# Altium PCB Lab5_TB_PCB1.PcbDoc
Units mil, origin at the board's own origin, x right, y up, seen from the top; angles counter-clockwise.
Board outline 1425 x 1380 mil, 2 copper layers (Top Layer, Bottom Layer); 22 components, 25 nets, 79 pads, 4 vias.
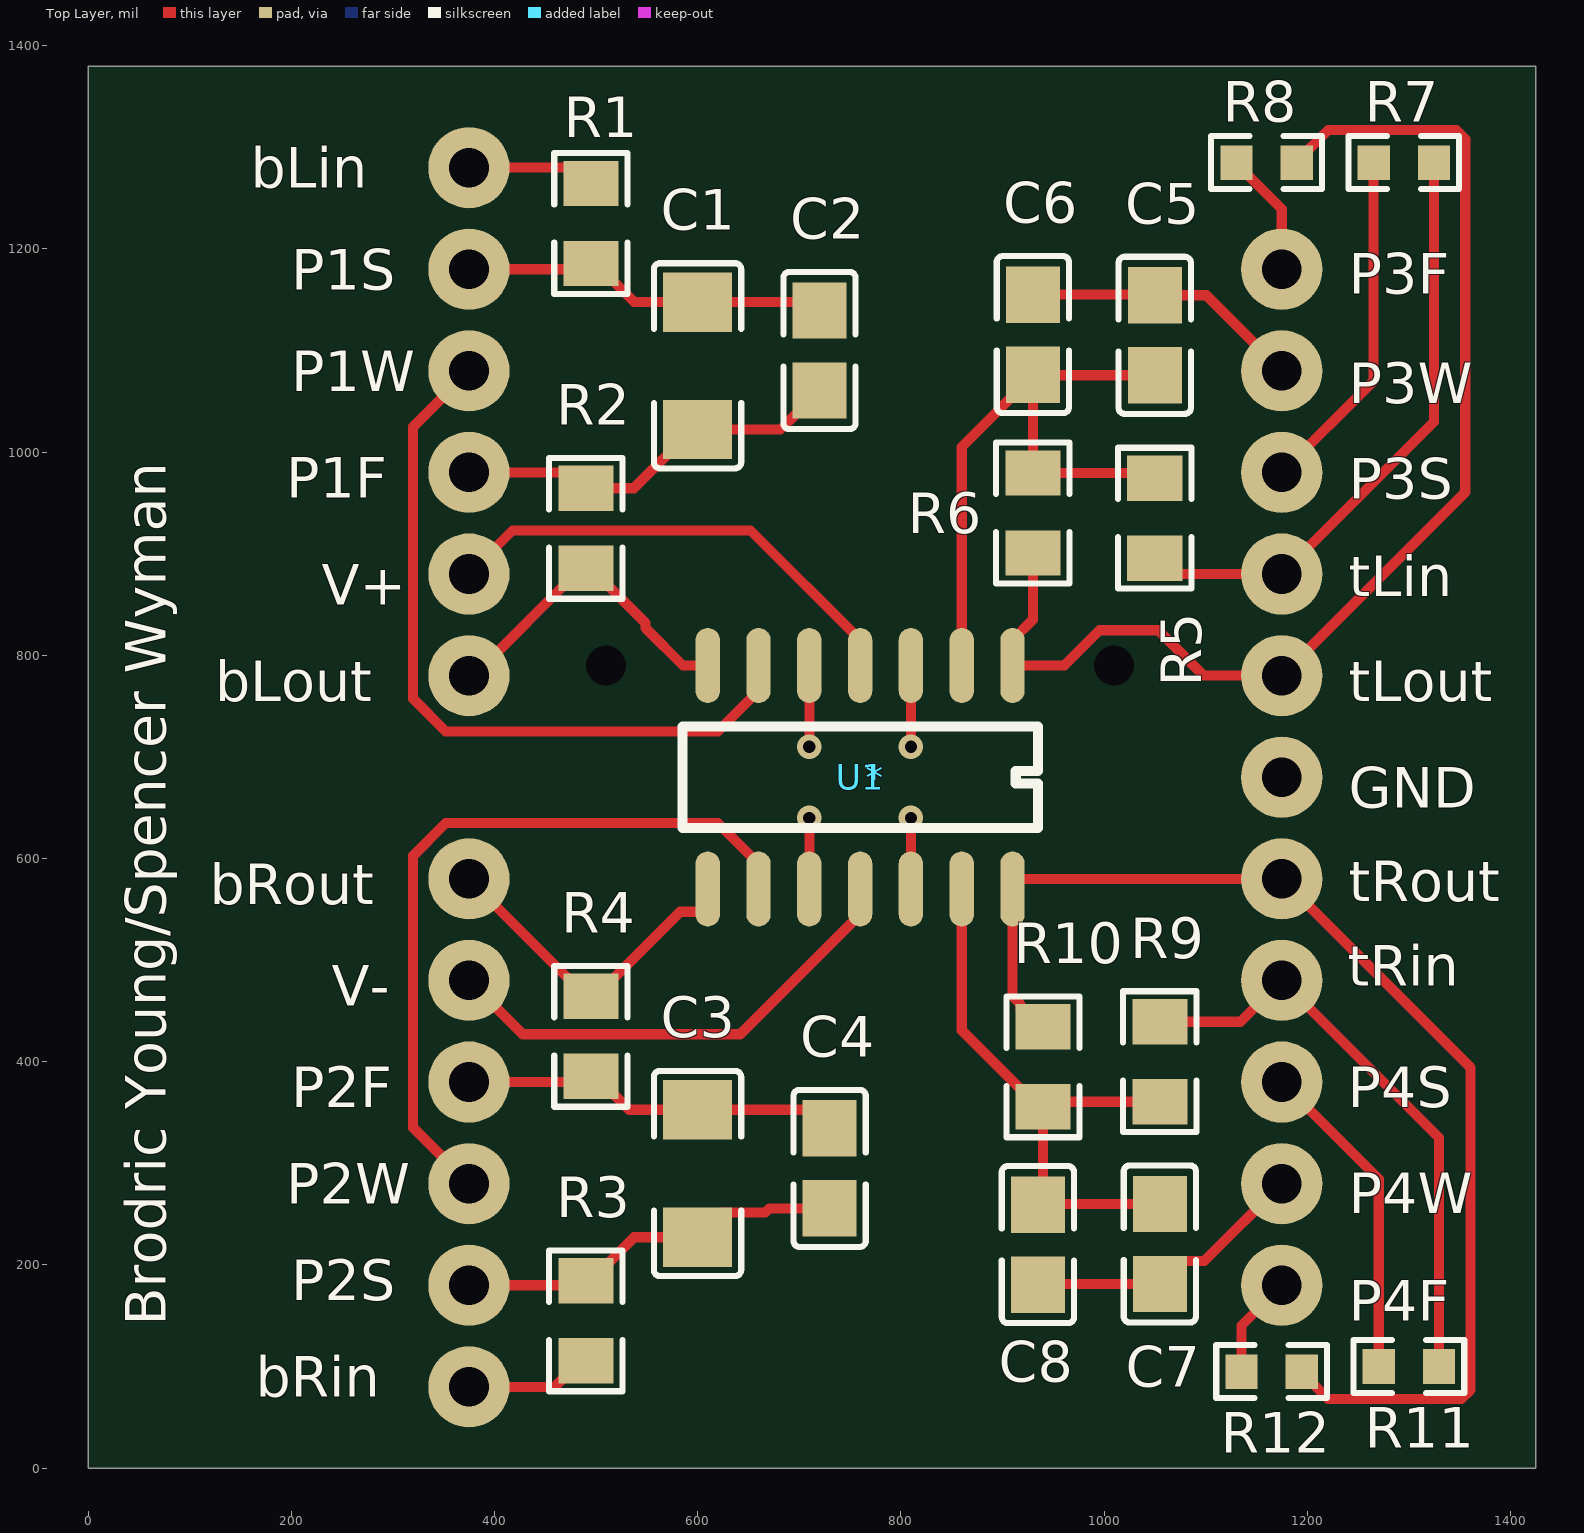
[diagram p0: Top Layer view]
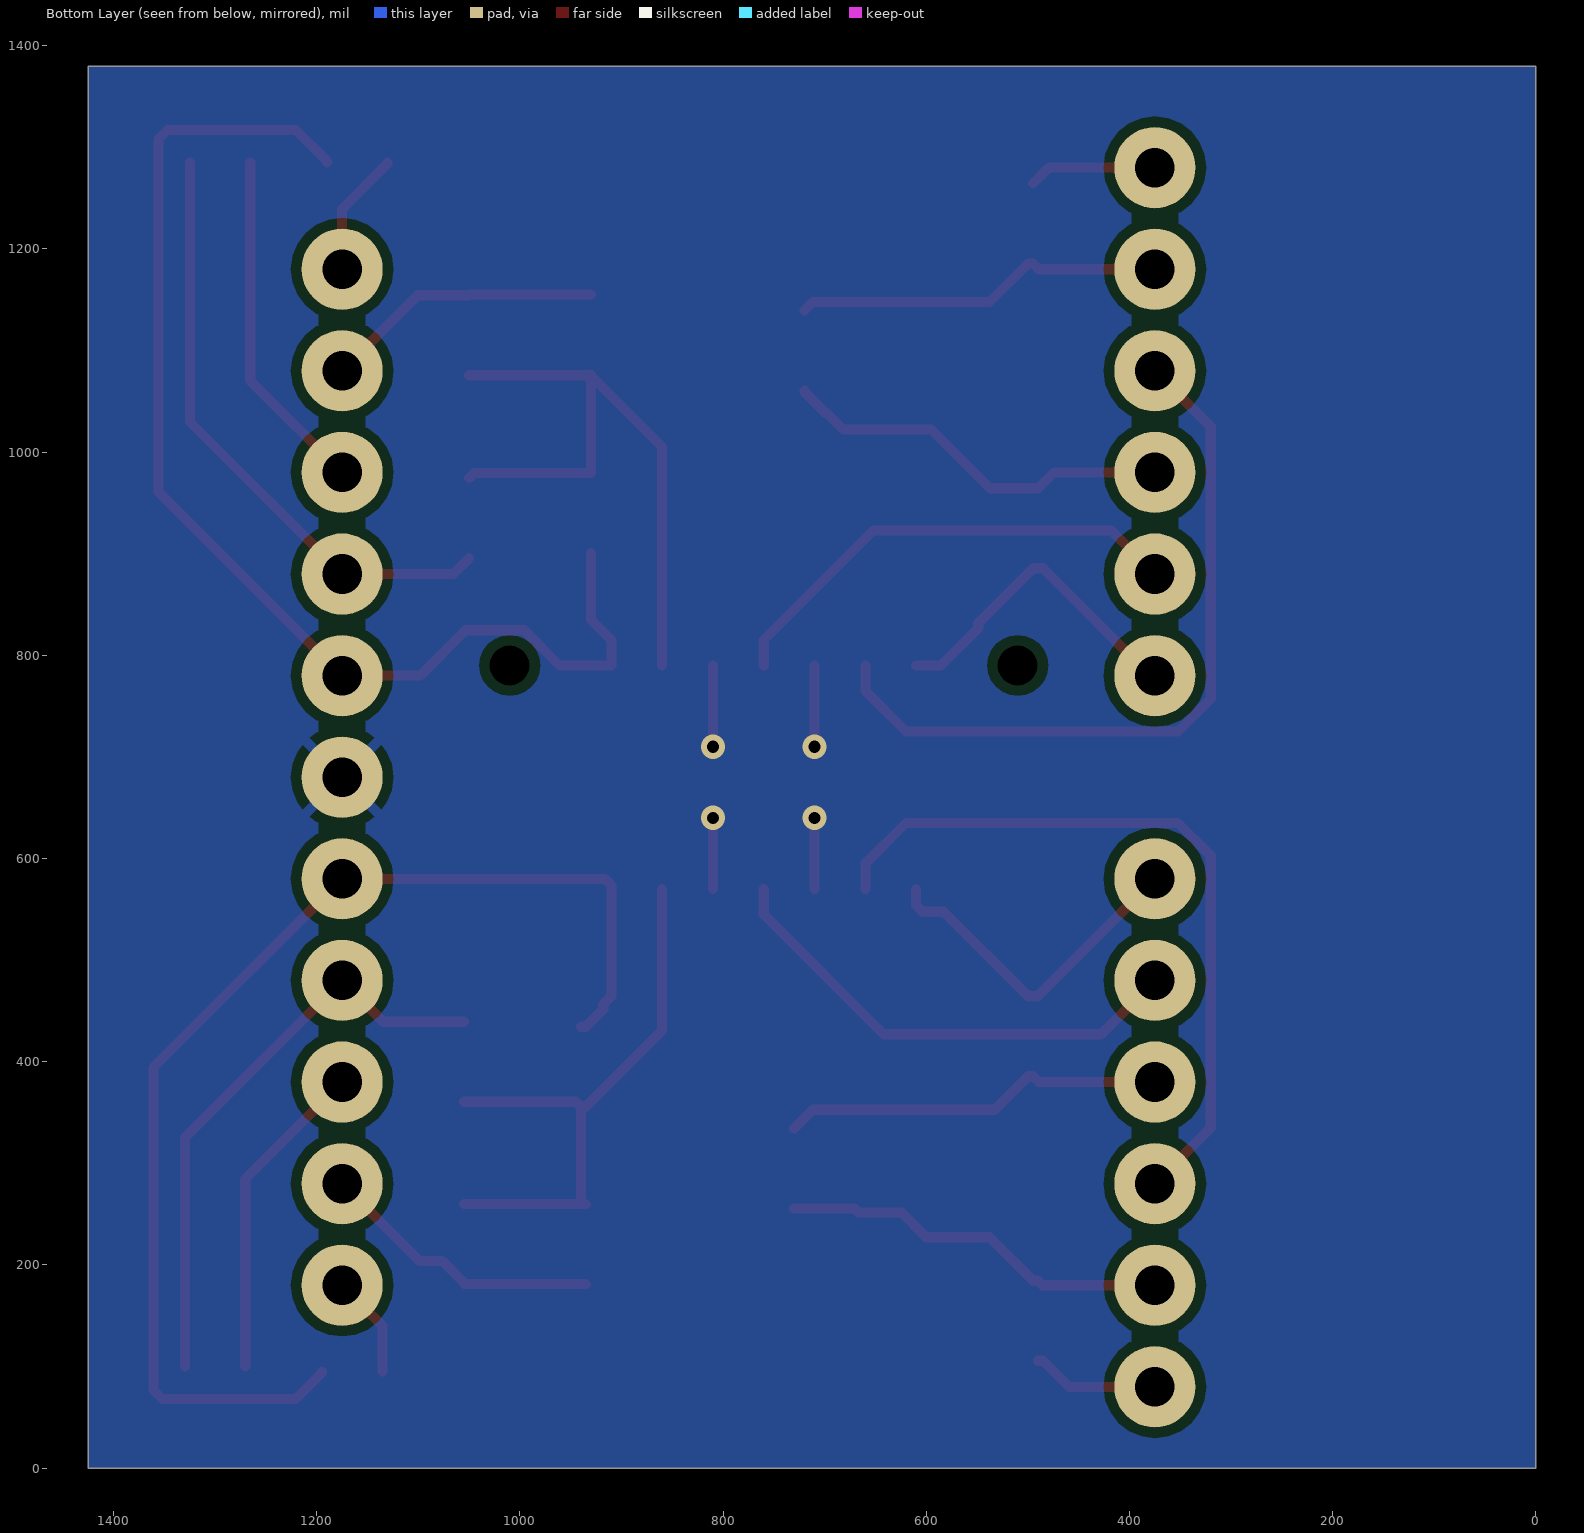
[diagram p1: Bottom Layer view, seen from below]

## Layer stack, top to bottom
Top Solder: solder mask 0.4, Solder Resist, Dk 3.5
Top Layer: signal copper 1.4
Dielectric 1: dielectric 12.6, FR-4, Dk 4.8
Bottom Layer: signal copper 1.4
Bottom Solder: solder mask 0.4, Solder Resist, Dk 3.5

## Board outline
0,0 0,1380 1425,1380 1425,0

## Design rules (kind name [scope] priority, off if disabled: settings)
AssemblyTestPointUsage [All] p1: isadvanced=TRUE
AssemblyTestpoint [All] p1: isadvanced=TRUE testpointundercomponent=TRUE minsize=40 maxsize=100 preferedsize=60 minholesize=0 maxholesize=40 preferedholesize=32 testpointgrid=1 usegrid=TRUE gridtolerance=0.01 allowsidetop=TRUE allowsidebottom=TRUE
Clearance Clearance_1 [OnMid vs OnMid] p1: gap=10 ignorepadtopadclearanceinfootprint=FALSE sourcerule=41 cellrowname=All cellrowtype=0 cellcolname=All cellcoltype=0 innerlayers=TRUE
Clearance Clearance_2 [(ExistsOnLayer('Top Layer') Or ExistsOnLayer('Bottom Layer')) vs (ExistsOnLayer('Top Layer') Or ExistsOnLayer('Bottom Layer'))] p2: gap=10 ignorepadtopadclearanceinfootprint=FALSE sourcerule=41 cellrowname=All cellrowtype=0 cellcolname=All cellcoltype=0 outerlayers=TRUE
Clearance [All] p3: gap=10 ignorepadtopadclearanceinfootprint=FALSE ismatrix=TRUE
ComponentClearance [All] p1: isadvanced=TRUE gap=10 collisioncheckmode=3 verticalgap=10 showdistances=FALSE
FabricationTestPointUsage [All] p1: isadvanced=TRUE valid=0 allowmultiple=FALSE
FabricationTestpoint [All] p1: isadvanced=TRUE side=3 testpointundercomponent=TRUE minsize=40 maxsize=100 preferedsize=60 minholesize=0 maxholesize=40 preferedholesize=32 testpointgrid=1 allowsidetop=TRUE allowsidebottom=TRUE usegrid=TRUE gridtolerance=0.01
FanoutControl Fanout_BGA [IsBGA] p1: isadvanced=TRUE bgadir=Out bgaviamode=Centered fanoutstyle=Auto fanoutdirection=Alternating viagrid=1 // Fanout_BGA (Default Rule)
FanoutControl Fanout_LCC [IsLCC] p2: isadvanced=TRUE bgadir=Out bgaviamode=Centered fanoutstyle=Auto fanoutdirection=Alternating viagrid=1 // Fanout_LCC (Default Rule)
FanoutControl Fanout_SOIC [IsSOIC] p3: isadvanced=TRUE bgadir=Out bgaviamode=Centered fanoutstyle=Auto fanoutdirection=Alternating viagrid=1 // Fanout_SOIC (Default Rule)
FanoutControl Fanout_Small [(CompPinCount < 5)] p4: isadvanced=TRUE bgadir=Out bgaviamode=Centered fanoutstyle=Auto fanoutdirection=OutThenIn viagrid=1 // Fanout_Small (Default Rule)
FanoutControl Fanout_Default [All] p5: isadvanced=TRUE bgadir=Out bgaviamode=Centered fanoutstyle=Auto fanoutdirection=Alternating viagrid=1 // Fanout_Default (Default Rule)
Height [All] p1: isadvanced=TRUE minheight=0 maxheight=1000 prefheight=500
HoleSize [All] p1: isadvanced=TRUE absolutevalues=TRUE maxlimit=100 minlimit=1 maxpercent=80.000 minpercent=20.000
HoleToHoleClearance [All] p1: isadvanced=TRUE gap=10 allowstackedmicrovias=TRUE
LayerPairs [All] p1: isadvanced=TRUE enforce=TRUE
MinimumSolderMaskSliver [All] p1: isadvanced=TRUE minsoldermaskwidth=10
NetAntennae [All] p1: isadvanced=TRUE netantennaetolerance=0
PasteMaskExpansion [All] p1: isadvanced=TRUE expansion=0
PlaneClearance [All] p1: isadvanced=TRUE clearance=20
PlaneConnect [All] p1: isadvanced=TRUE planeconnectstyle=Relief reliefexpansion=20 reliefentries=4 reliefconductorwidth=10 reliefairgap=10
PolygonConnect [All] p1: thpad.connectstyle=Relief thpad.reliefconductorwidth=10 thpad.reliefentries=4 thpad.polygonreliefangle="45 Angle" thpad.airgapwidth=10 smdpad.connectstyle=Relief smdpad.reliefconductorwidth=10 smdpad.reliefentries=4 smdpad.polygonreliefangle="90 Angle" smdpad.airgapwidth=10 via.connectstyle=Direct via.reliefconductorwidth=10 via.reliefentries=4 via.polygonreliefangle="90 Angle" via.airgapwidth=10
RoutingCorners [All] p1: isadvanced=TRUE cornerstyle=45-Degree minsetback=100 maxsetback=100
RoutingPriority [All] p1: isadvanced=TRUE routingpriority=0
RoutingVias [All] p1: holewidth=12 width=24 viastyle="Through Hole" minholewidth=12 minwidth=24 maxholewidth=12 maxwidth=24
ShortCircuit [All] p1: isadvanced=TRUE allowed=FALSE
SilkToSilkClearance [All] p1: isadvanced=TRUE silktosilkclearance=10
SilkToSolderMaskClearance [IsPad] p1: isadvanced=TRUE minsilkscreentomaskgap=10 clearancetoexposedcopper=TRUE
SolderMaskExpansion [All] p1: isadvanced=TRUE expansion=4 istentingtop=FALSE
SupplyNets "Schematic Supply Nets_4" [InNet('Vpos')] p1: isadvanced=TRUE voltage=0.000
SupplyNets "Schematic Supply Nets_3" [InNet('tLin')] p2: isadvanced=TRUE voltage=0.000
SupplyNets "Schematic Supply Nets_2" [InNet('bLin')] p3: isadvanced=TRUE voltage=0.000
SupplyNets "Schematic Supply Nets_1" [InNet('GND')] p4: isadvanced=TRUE voltage=0.000
SupplyNets "Schematic Supply Nets" [InNet('Vneg')] p5: isadvanced=TRUE voltage=0.000
UnRoutedNet [All] p1: isadvanced=TRUE
UnpouredPolygon [All] p1: isadvanced=TRUE
Width [All] p1: maxlimit=10 minlimit=10 preferedwidth=10
4 further rules are at their usual default settings.

## Components (designator, comment, footprint, x,y, rotation, side; value= is the part's Value field where it differs from the comment)
* "23 Pin Header" KBS_23pin_Header_TB_EQ 1174.93,680 r0 top locked
C1 "GRM31M5C1H473JA01L" C1206 599.93,1085 r270 top value=47nF
C2 "0805B332K500NT" C0805 719.93,1100 r90 top value=3.3nF
C3 "GRM31M5C1H473JA01L" C1206 599.93,290 r90 top value=47nF
C4 "0805B332K500NT" C0805 729.93,295 r270 top value=3.3nF
C5 "0805B333K500NT" C0805 1049.93,1115 r90 top value=33nF
C6 "0805B332K500NT" C0805 929.93,1115.63 r90 top value=3.3nF
C7 "0805B333K500NT" C0805 1054.93,220.63 r270 top value=33nF
C8 "0805B332K500NT" C0805 934.93,220 r270 top value=3.3nF
R1 "ARG05FTC4001N" R0805 494.94,1225 r270 top value=4kΩ
R2 "ARG05FTC4001N" R0805 489.94,925 r270 top value=4kΩ
R3 "ARG05FTC4001N" R0805 489.94,145 r90 top value=4kΩ
R4 "ARG05FTC4001N" R0805 494.94,425 r90 top value=4kΩ
R5 "ARG05FTC4001N" R0805 1049.93,935 r90 top value=4kΩ
R6 "ARG05FTC4001N" R0805 929.93,940 r270 top value=4kΩ
R7 "0603WAF8200T5E" R0603 1295,1285 r180 top value=820Ω
R8 "0603WAF8200T5E" R0603 1160,1285 r0 top value=820Ω
R9 "ARG05FTC4001N" R0805 1054.93,400 r270 top value=4kΩ
R10 "ARG05FTC4001N" R0805 939.93,395 r90 top value=4kΩ
R11 "0603WAF8200T5E" R0603 1300,100 r180 top value=820Ω
R12 "0603WAF8200T5E" R0603 1165,95 r0 top value=820Ω
U1 "LM324DT" KBS_SO14_w_Guide_Pin_Holes 759.93,680 r180 top

## Footprints (in the part's own frame and the unit in brackets; to place one, negate y for a bottom-side part, rotate by r counter-clockwise, add the part's x,y. Pads: shape width x height; smd on the part's side, far side on the other; paste and mask are expansions set on the pad)
C0805 [mm]
  rect 1.41x1.35 smd paste-100 mask+0.051: 1(-1,0) 2(1,0)
  silkscreen extent -1.96,-0.9 1.96,0.9
C1206 [mm]
  rect 1.485x1.728 smd paste-100 mask+0.051: 1(-1.593,0) 2(1.593,0)
  silkscreen extent -2.56,-1.09 2.56,1.09
KBS_23pin_Header_TB_EQ [mil]
  round 80 hole 39 mask+2: 1(-800,600) 2(0,500) 3(-800,500) 4(0,400) 5(-800,400) 6(0,300) 7(-800,300) 8(0,200) 9(-800,200) 10(0,100) 11(-800,100) 12(0,0) 13(-800,-100) 14(0,-100) 15(-800,-200) 16(0,-200) 17(-800,-300) 18(0,-300) 19(-800,-400) 20(0,-400) 21(-800,-500) 22(0,-500) 23(-800,-600)
  body extent -840,-645 40,640, height 1
KBS_SO14_w_Guide_Pin_Holes [mil]
  oval 24x74 smd paste+0 mask+2: 1(-150,-110) 2(-100,-110) 3(-50,-110) 4(0,-110) 5(50,-110) 6(100,-110) 7(150,-110) 8(150,110) 9(100,110) 10(50,110) 11(0,110) 12(-50,110) 13(-100,110) 14(-150,110)
  round 0 hole 39.37 unplated mask+0: MH_1(250,-110) MH_2(-250,-110)
  silkscreen extent -175,-50 175,50, body extent -187,-147 187,147, height 1
R0603 [mil]
  rect 31.75x34.02 smd paste-3937.01 mask+2: 1(-29.66,0) 2(29.66,0)
  silkscreen extent -55,-26 55,26
R0805 [mm]
  rect 1.133x1.377 smd paste-100 mask+0.051: 1(-1,0) 2(1,0)
  silkscreen extent -1.76,-0.92 1.76,0.92

## Part data
C1 C3: "Capacitance: Tolerance:±5% Tolerance:±5% Voltage Rated: Temperature Coefficient:", JLCPCB Part Class="Extended Part", LCSC Part Name="47nF ±5% 50V", Manufacturer=muRata(村田), Tolerance=±5%, Add into BOM=yes, Convert to PCB=yes, Datasheet=https://atta.szlcsc.com/upload/public/pdf/source/20180228/C21812_15198055830211377594.pdf, Device=GRM31M5C1H473JA01L, Manufacturer Part=GRM31M5C1H473JA01L, Supplier=LCSC, Supplier Footprint=1206, Supplier Part=C21812, Symbol=GRM31M5C1H473JA01L
C2 C4 C6 C8: "Capacitance:3.3nF Tolerance:±10% Tolerance:±10% Voltage Rated: Temperature Coefficient:", JLCPCB Part Class="Extended Part", LCSC Part Name="3.3nF ±10% 50V", Manufacturer=FH(风华), Tolerance=±10%, Add into BOM=yes, Convert to PCB=yes, Datasheet=https://atta.szlcsc.com/upload/public/pdf/source/20200305/C486355_26A10D38EF8C2A5C37091D0039909270.pdf, Device=0805B332K500NT, Manufacturer Part=0805B332K500NT, Supplier=LCSC, Supplier Footprint=0805, Supplier Part=C1738, Symbol=0805B332K500NT
C5 C7: "Capacitance:33nF Tolerance:±10% Tolerance:±10% Voltage Rated: Temperature Coefficient:", JLCPCB Part Class="Basic Part", LCSC Part Name="33nF ±10% 50V", Manufacturer=FH(风华), Tolerance=±10%, Add into BOM=yes, Convert to PCB=yes, Datasheet=https://atta.szlcsc.com/upload/public/pdf/source/20200305/C486355_26A10D38EF8C2A5C37091D0039909270.pdf, Device=0805B333K500NT, Manufacturer Part=0805B333K500NT, Supplier=LCSC, Supplier Footprint=0805, Supplier Part=C1739, Symbol=0805B333K500NT
R1 R2 R3 R4 R5 R6 R9 R10: "Type:Thin Film Resistor Resistance: Tolerance:±1% Tolerance:±1% Power(Watts): Overload Voltage (Max): Temperature Coefficient:±25ppm/℃ Temperature Coefficient:±25ppm/℃ Operating Temperature Range:-55℃~+155℃ Operating Temperature Range:-55℃~+155℃", LCSC Part Name="薄膜电阻 4kΩ ±1% 125mW", Manufacturer=Viking(光颉), Operating Temperature Range=-55℃~+155℃, Temperature Coefficient=±25ppm/℃, Tolerance=±1%, Add into BOM=yes, Convert to PCB=yes, Datasheet=https://atta.szlcsc.com/upload/public/pdf/source/20211009/C2828883_CAE7D170B8B230FC4A048BDC7B3A81FC.pdf, Device=ARG05FTC4001N, Manufacturer Part=ARG05FTC4001N, Supplier=LCSC, Supplier Footprint=0805, Supplier Part=C2828855, Symbol=ARG05FTC4001N, Type="Thin Film Resistor"
R7 R8 R11 R12: "Type:Thick Film Resistors Resistance: Tolerance:±1% Tolerance:±1% Power(Watts): Overload Voltage (Max): Temperature Coefficient:±100ppm/℃ Temperature Coefficient:±100ppm/℃ Operating Temperature Range:-55℃~+155℃ Operating Temperature Range:-55℃~+155℃", LCSC Part Name="820Ω ±1% 100mW 厚膜电阻", Manufacturer=UNI-ROYAL(厚声), Operating Temperature Range=-55℃~+155℃, Temperature Coefficient=±100ppm/℃, Tolerance=±1%, Add into BOM=yes, Convert to PCB=yes, Datasheet=https://atta.szlcsc.com/upload/public/pdf/source/20200306/C422600_1E6D84923E4A46A82E41ADD87F860B5C.pdf, Device=0603WAF8200T5E, Manufacturer Part=0603WAF8200T5E, Supplier=LCSC, Supplier Footprint=0603, Supplier Part=C23253, Symbol=0603WAF8200T5E, Type="Thick Film Resistors"
U1: "Number of Circuits:Quad Gain Bandwidth Product(GBP):1.3MHz Current - Input Bias(Ib):20nA Slew Rate(SR):0.4V/us Output Current:40mA -3db Bandwidth:- Supply Current:1.5mA Operating Temperature:0℃~+70℃ Operating Temperature:0℃~+70℃", Current - Input Bias(Ib)=20nA, JLCPCB Part Class="Basic Part", Manufacturer=ST(意法半导体), Operating Temperature=0℃~+70℃, Output Current=40mA, Supply Current=1.5mA, -3db Bandwidth=-, Add into BOM=yes, Convert to PCB=yes, Datasheet=https://atta.szlcsc.com/upload/public/pdf/source/20160408/1460100649718.pdf, Device=LM324DT, Gain Bandwidth Product(GBP)=1.3MHz, LCSC Part Name=LM324DT, Manufacturer Part=LM324DT, Number of Circuits=Quad, Relevance=|, Slew Rate(SR)=0.4V/us, Supplier=LCSC, Supplier Footprint=SOIC-14, Supplier Part=C71035, Symbol=LM324DT

## Via types
v1: diameter 24, hole 12, Top Layer to Bottom Layer, tented both sides, 4 vias

## Nets (pads, with @x,y where several pads share a name; then routed paths per layer and width w, separated by ;. In a path a pad name is that pad's centre, name@x,y a point inside that pad or via, vN(x,y) a via of type N, cw(c..) or ccw(c..) an arc to the next point about the centre after c; other vN are vias at no path point)
bLin: *.1 R1.1 | length 126.5
  Top Layer w10: *.1 479.31,1280 R1.1
bLout: *.11 R2.2 U1.7 | length 321.2
  Top Layer w10: *.11 379.49,780 485.12,885.63 R2.2 494.75,885.63 548.8,831.57 548.8,826.76 585.57,790 U1.7
bRin: *.23 R3.1 | length 125.6
  Top Layer w10: *.23 459.49,80 485.12,105.63 R3.1
bRout: *.13 R4.2 U1.8 | length 336.3
  Top Layer w10: *.13 374.94,579.56 490.12,464.37 R4.2 499.75,464.37 582.93,547.56 603.47,547.56 609.93,554.02 U1.8
GND: *.12 U1.3 U1.5 U1.10 U1.12 | length 300
  Top Layer w10: U1.10 v1(709.93,640) ; v1(709.93,710) U1.5 ; U1.12 v1(809.93,640) ; v1(809.93,710) U1.3
NetC5_1: C5.1 C6.1 R5.2 R6.1 U1.2 | length 652.4
  Top Layer w10: U1.2 859.93,1005.08 C6.1@929.93,1075.08 ; C6.1 C6.1@929.93,1075.08 ; C6.1@930.57,1075.63 C5.1 ; R5.2 1044.93,979.37 R6.1 C6.1@929.93,1075.08
NetC7_1: C7.1 C8.1 R9.2 R10.1 U1.13 | length 578.9
  Top Layer w10: U1.13 859.93,430.82 935.12,355.63 R10.1 ; C8.1 935.57,260 C7.1 ; C8.1@939.93,264.37 R10.1 ; R9.2 944.93,360.63 R10.1
P1F: *.7 C1.2 C2.1 R2.1 | length 392
  Top Layer w10: *.7 474.31,980 R2.1 537.22,964.37 595.15,1022.3 C1.2 681.61,1022.3 697.18,1037.87 698.36,1037.87 719.93,1059.45 C2.1
P1S: *.3 C1.1 C2.2 R1.2 | length 366.5
  Top Layer w10: *.3 489.31,1180 R1.2 499.75,1185.63 537.68,1147.7 C1.1 711.61,1147.7 C2.2
P1W: *.5 U1.6 | length 740.5
  Top Layer w10: *.5 319.94,1025 319.94,757.22 352.15,725 619.93,725 659.93,765 U1.6
P2F: *.17 C3.2 C4.1 R4.1 | length 378.6
  Top Layer w10: *.17 489.31,380 R4.1 499.75,385.63 532.68,352.7 C3.2 711.61,352.7 C4.1
P2S: *.21 C3.1 C4.2 R3.2 | length 386.3
  Top Layer w10: *.21 485.56,180 R3.2 494.75,184.37 537.68,227.3 C3.1 624.17,251.53 666.61,251.53 670.7,255.63 C4.2
P2W: *.19 U1.9 | length 740.5
  Top Layer w10: *.19 319.94,335 319.94,602.78 352.15,635 619.93,635 659.93,595 U1.9
P3F: *.2 R8.1 | length 123.5
  Top Layer w10: R8.1 1130.34,1283.87 1174.93,1239.27 *.2
P3S: *.6 R7.2 | length 342.4
  Top Layer w10: *.6 1265.34,1070.4 R7.2
P3W: *.4 C5.2 C6.2 | length 276.1
  Top Layer w10: C6.2 1049.31,1155 C5.2 1100.57,1154.37 *.4
P4F: *.22 R12.1 | length 101.4
  Top Layer w10: R12.1 1135.34,140.41 *.22
P4S: *.18 R11.2 | length 319.5
  Top Layer w10: *.18 1270.34,284.6 R11.2
P4W: *.20 C7.2 C8.2 | length 281.9
  Top Layer w10: C8.2 935.57,181.26 C7.2 1054.93,182.44 1076.51,204.02 1098.95,204.02 *.20
tLin: *.8 R5.1 R7.1 | length 598.5
  Top Layer w10: R5.1 1065.57,880 *.8 1324.66,1029.72 R7.1
tLout: *.10 R6.2 R8.2 U1.1 | length 1203.3
  Top Layer w10: R6.2 929.93,835 909.93,815 U1.1 960.88,790 995.57,824.69 1053.44,824.69 1098.12,780 *.10 1355.54,960.6 1355.54,1308.22 1346.75,1317.01 1220.54,1317.01 1189.66,1286.13 R8.2
tRin: *.16 R9.1 R11.1 | length 580.9
  Top Layer w10: R9.1 1134.31,439.37 *.16 1329.66,325.27 R11.1
tRout: *.14 R10.2 R12.2 U1.14 | length 1183.6
  Top Layer w10: R10.2 935.12,434.37 917.83,451.66 917.83,456.48 909.93,464.37 U1.14 909.93,573.53 916.4,580 *.14 1360.54,394.4 1360.54,76.78 1351.75,67.99 1220.54,67.99 1194.66,93.87 R12.2
Vneg: *.15 U1.11 | length 480.8
  Top Layer w10: *.15 427.86,427.08 642.01,427.08 759.93,545 U1.11
Vpos: *.9 U1.4 | length 472.5
  Top Layer w10: *.9 417.86,922.92 652.01,922.92 759.93,815 U1.4
pads on no net: U1.MH_1 U1.MH_2

## Polygon pours and split planes (outlines as drawn)
GND on Bottom Layer "GND_L02_P000" (solid, pour order 0): 0,0 0,1380 1425,1380 1425,0

## Silkscreen, mask and mechanical layers (free items; w line width, h text height)
Top Overlay:
  text "Brodric Young/Spencer Wyman" at 76.67,140 h40 r90
Mechanical 1:
  the board outline again, w10

## Text inside footprints (layer, text, board x,y; h text height)
*: Top Overlay "P4F" at 1240.92,145 h40; Top Overlay "P4W" at 1240.92,251 h40; Top Overlay "P4S" at 1240,355 h40; Top Overlay "tRin" at 1240,475 h40; Top Overlay "tRout" at 1240.92,558 h40; Top Overlay "GND" at 1240.92,650 h40; Top Overlay "tLout" at 1240.92,755 h40; Top Overlay "tLin" at 1240.92,858 h40; Top Overlay "P3S" at 1240.92,954 h40; Top Overlay "P3W" at 1240.92,1048 h40; Top Overlay "P3F" at 1240.92,1156 h40; Top Overlay "bRin" at 165,70 h40; Top Overlay "P2S" at 200,165 h40; Top Overlay "P2W" at 195,260 h40; Top Overlay "P2F" at 200,355 h40; Top Overlay "V-" at 240,455 h40; Top Overlay "bRout" at 120,555 h40; Top Overlay "bLout" at 125,755 h40; Top Overlay "V+" at 230,850 h40; Top Overlay "P1F" at 195,955 h40; Top Overlay "P1W" at 200,1060 h40; Top Overlay "P1S" at 200,1160 h40; Top Overlay "bLin" at 160,1260 h40